# Altium PCB topvent.PcbDoc
Units mil, origin at the board's own origin, x right, y up, seen from the top; angles counter-clockwise.
Board outline 5000 x 5000 mil, 2 copper layers (Component Side, Bottom Layer), stack 65.3 mil thick; 9 components, 2 nets, 21 pads, 2 vias.
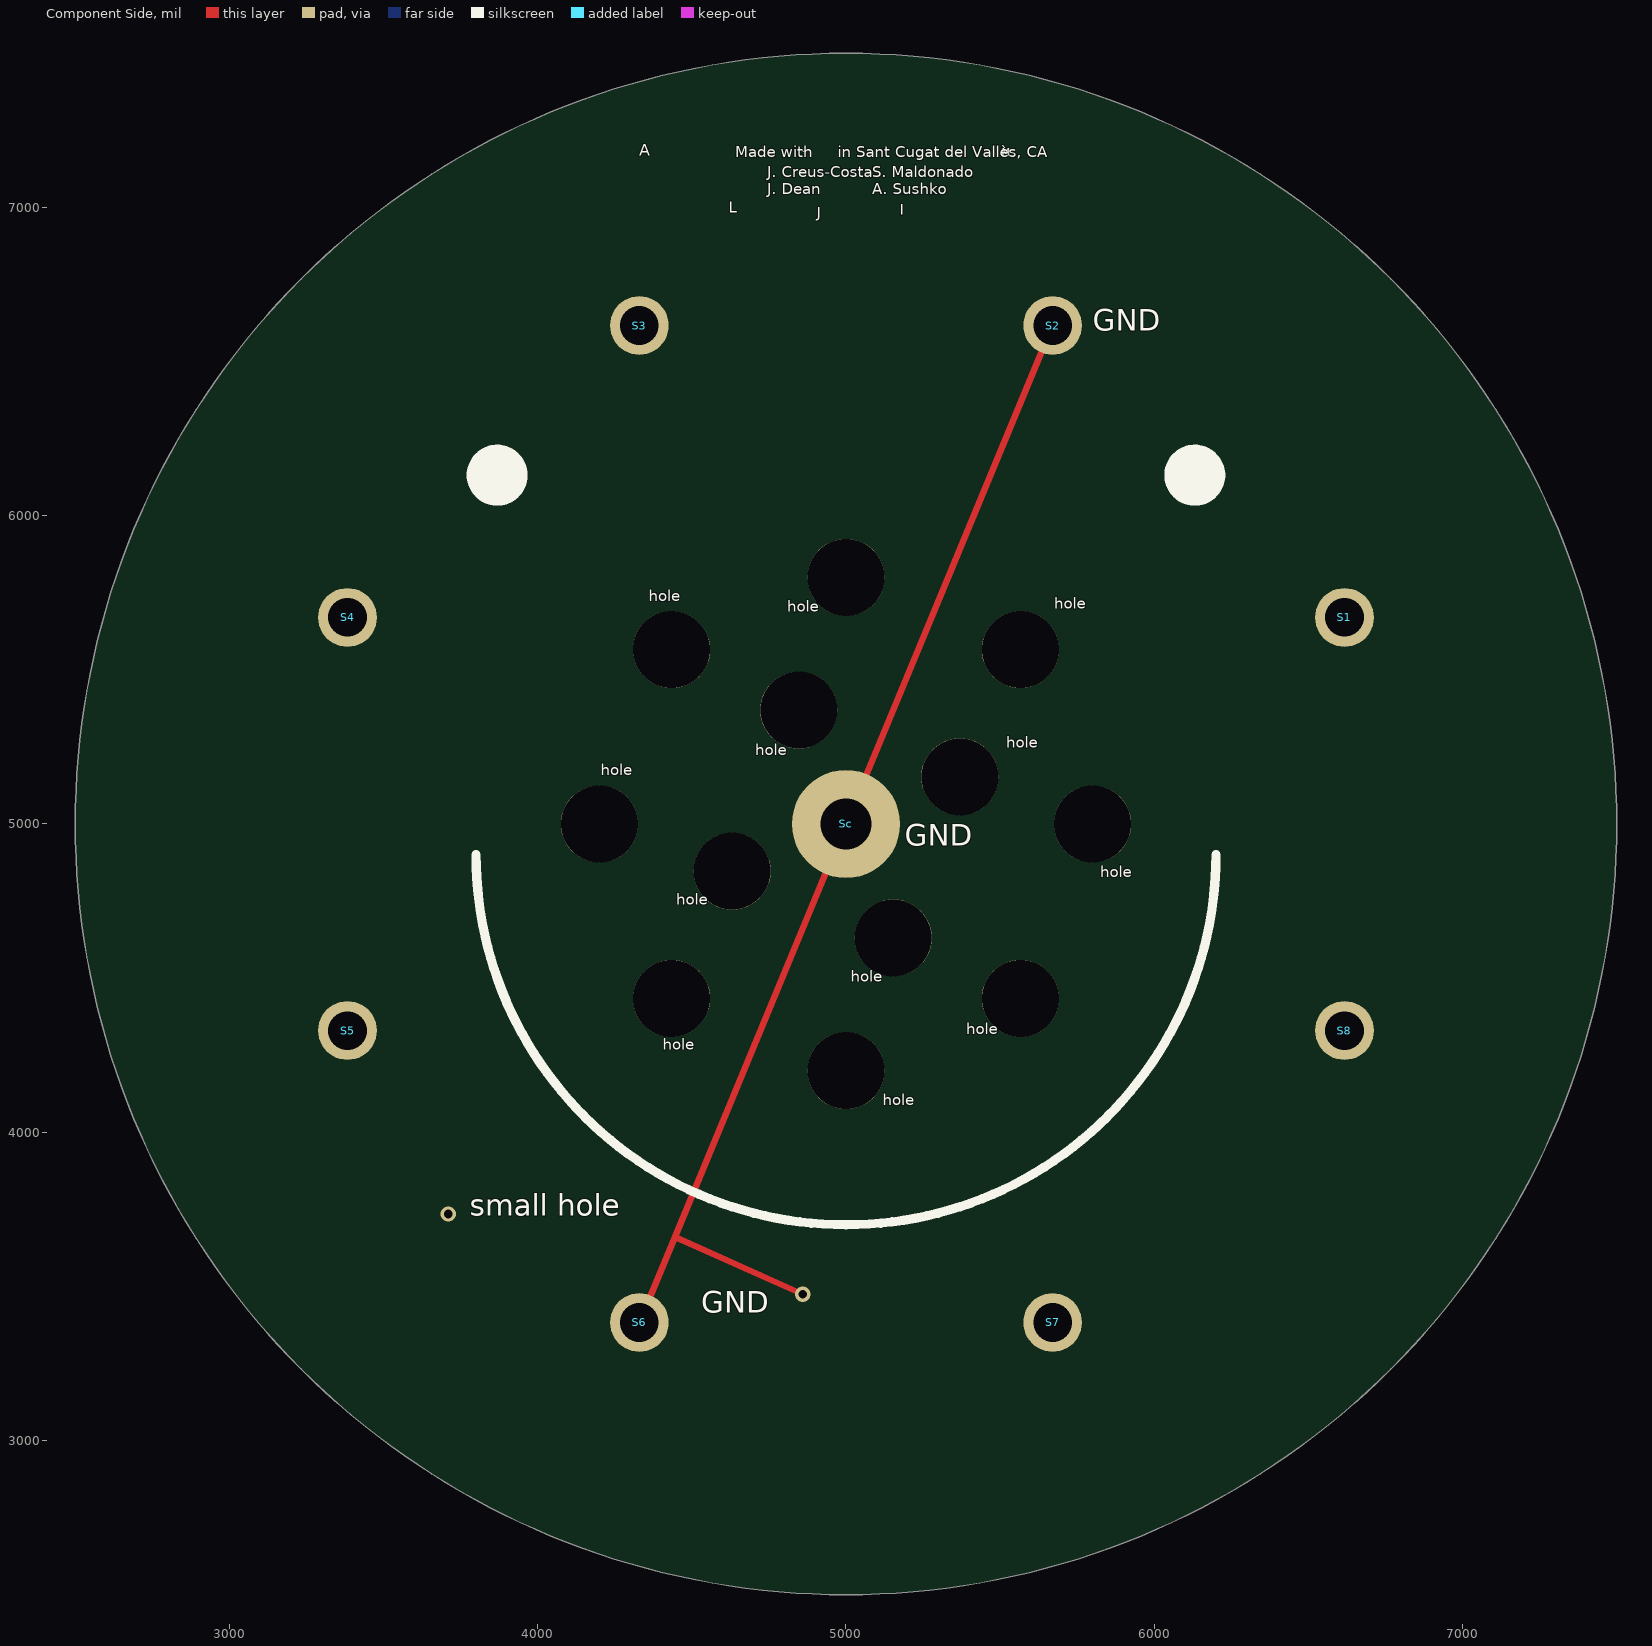
[diagram p0: Component Side view]
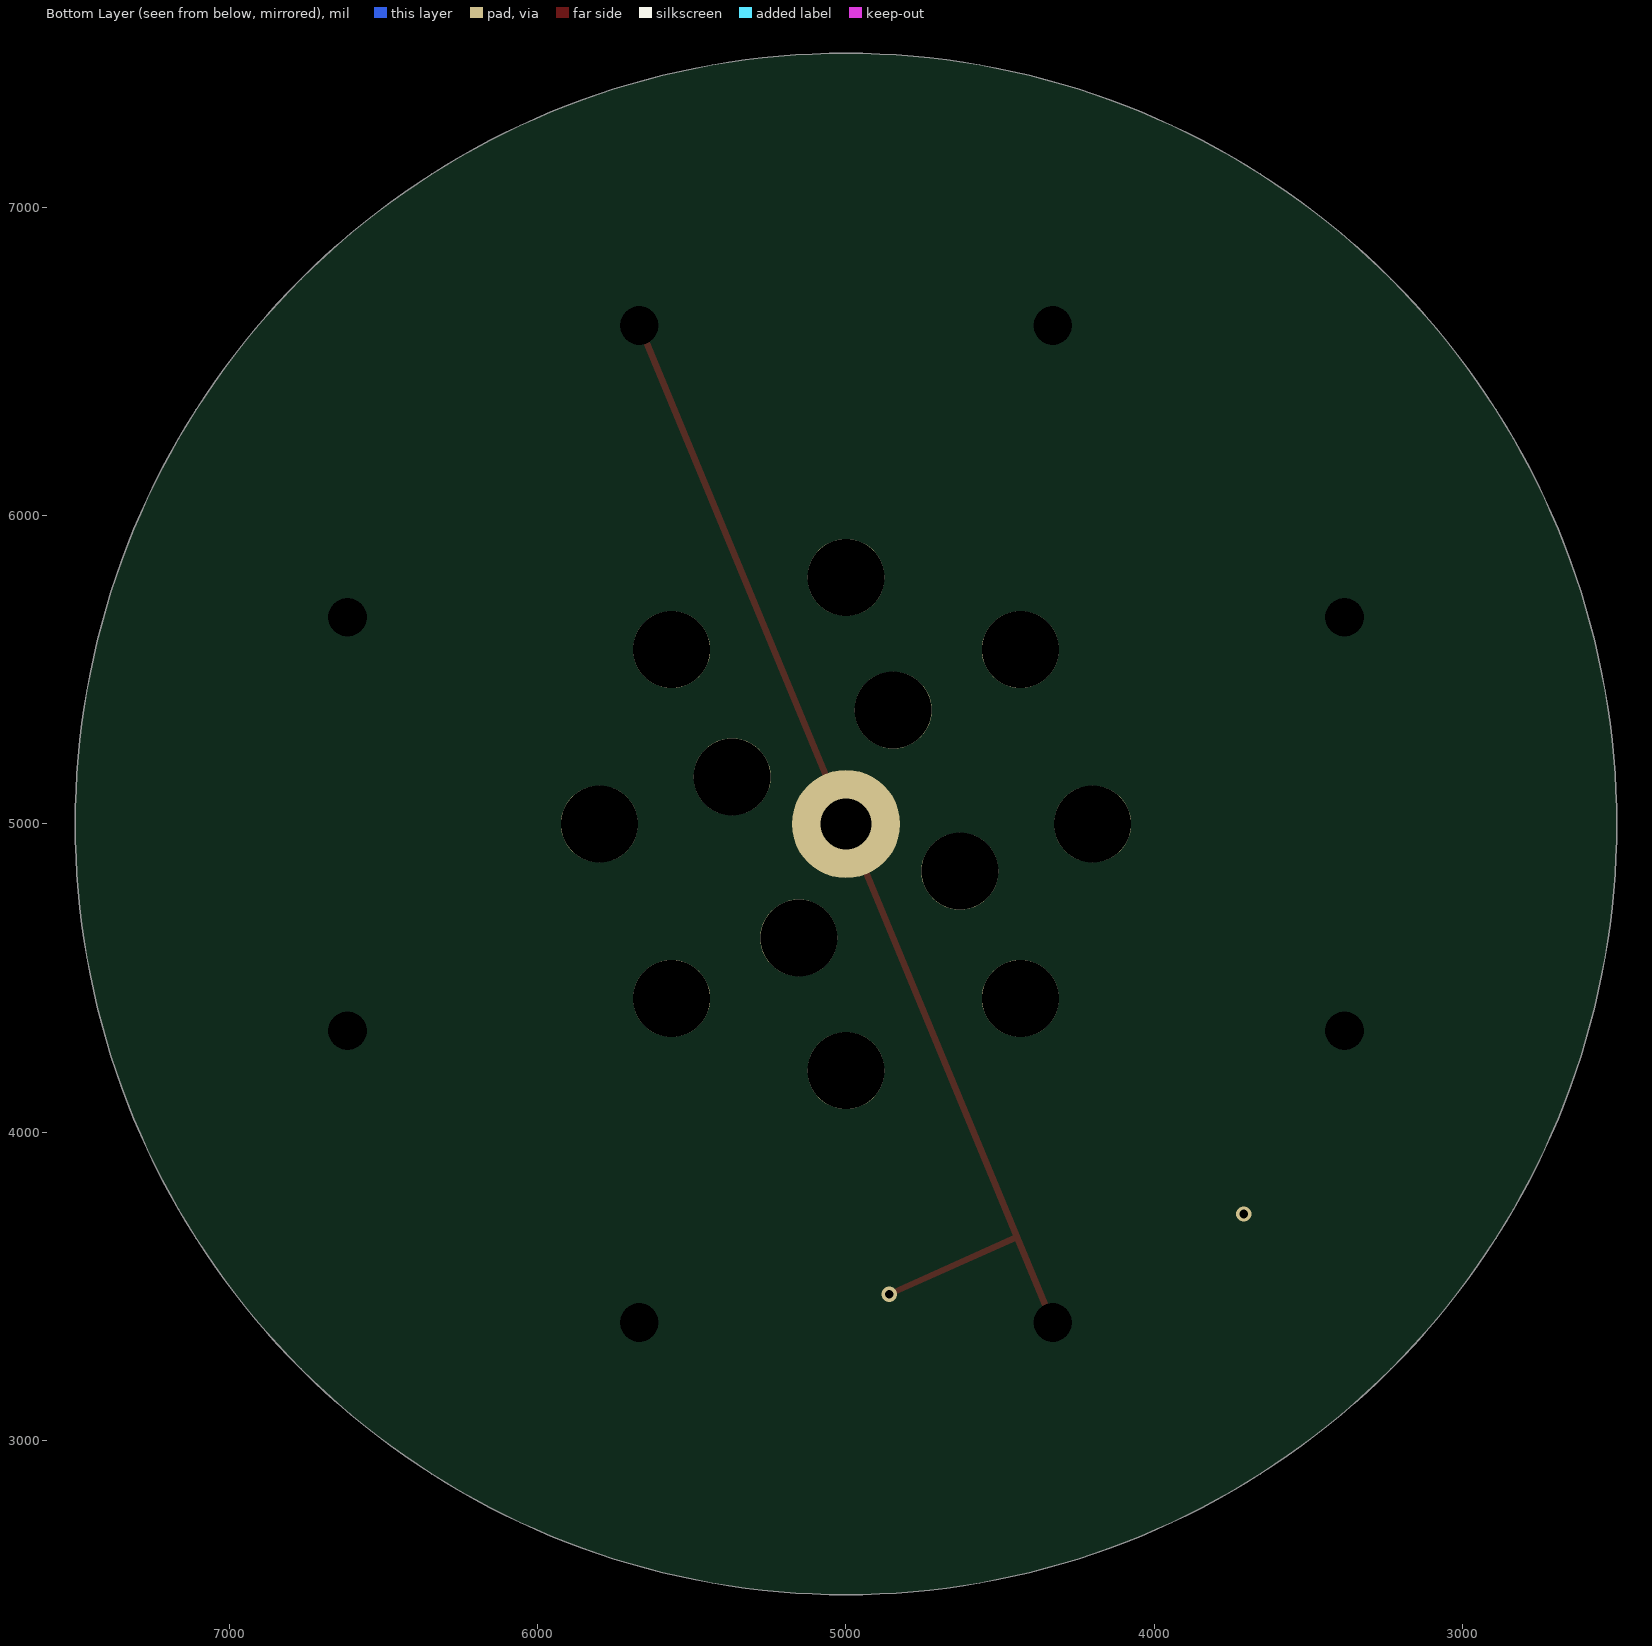
[diagram p1: Bottom Layer view, seen from below]

## Layer stack, top to bottom
Top Solder: solder mask 0.4, Solder Resist, Dk 3.5
Component Side: signal copper 1.4
Dielectric 1: core 62.5, FR-4, Dk 4.2
Bottom Layer: signal copper 1.4
Solder Side: solder mask 0.4, Solder Resist, Dk 3.5

## Board outline
5000,2500 cw(c5000,5000) 2500,5000 cw(c5000,5000) 5000,7500 cw(c5000,5000) 7500,5000 cw(c5000,5000)

## Design rules (kind name [scope] priority, off if disabled: settings)
Clearance [All] p1: gap=10 ignorepadtopadclearanceinfootprint=FALSE except(0: Arc-Hole Track-Hole SMDPad-Hole THPad-Hole Via-Hole Fill-Hole Poly-Hole Region-Hole Text-Hole)
HoleSize [All] p1: absolutevalues=TRUE maxlimit=247 minlimit=10 maxpercent=80.000 minpercent=20.000
PolygonConnect [All] p1: connectstyle=Relief reliefconductorwidth=10 reliefentries=4 polygonreliefangle="90 Angle" airgapwidth=10
RoutingVias [All] p1: holewidth=28 width=50 viastyle="Through Hole" minholewidth=28 minwidth=50 maxholewidth=28 maxwidth=50
SolderMaskExpansion [All] p1: expansion=4
Width [All] p1: maxlimit=10 minlimit=10 preferedwidth=10
29 further rules are at their usual default settings.

## Components (designator, comment, footprint, x,y, rotation, side; value= is the part's Value field where it differs from the comment)
S1 "4-40 Machine screw" SCREW_4-40#1 6445,5615 r0 top
S2 "4-40 Machine screw" SCREW_4-40#2 8895,2740 r0 top
S3 "4-40 Machine screw" SCREW_4-40#3 9145,2740 r0 top
S4 "4-40 Machine screw" SCREW_4-40#4 9390,2740 r0 top
S5 "4-40 Machine screw" SCREW_4-40#5 7240,3605 r0 top
S6 "4-40 Machine screw" SCREW_4-40#6 7490,3605 r0 top
S7 "4-40 Machine screw" SCREW_4-40#7 7740,3605 r0 top
S8 "4-40 Machine screw" SCREW_4-40#8 7985,3605 r0 top
Sc "4-40 Machine screw" SCREW_4-40#9 9940,2740 r0 top

## Footprints (in the part's own frame and the unit in brackets; to place one, negate y for a bottom-side part, rotate by r counter-clockwise, add the part's x,y. Pads: shape width x height; smd on the part's side, far side on the other; paste and mask are expansions set on the pad)
SCREW_4-40#1 [mil] "4-40 machine screw. Mmm.. tasty"
  oval 190x191 / inner oval 190x191 / far side round 0 hole 125 unplated: 1(172,55)
SCREW_4-40#2 [mil] "4-40 machine screw. Mmm.. tasty"
  oval 190x191 / inner oval 190x191 / far side round 0 hole 125 unplated: 1(-3225,3877)
SCREW_4-40#3 [mil] "4-40 machine screw. Mmm.. tasty"
  oval 190x191 / inner oval 190x191 / far side round 0 hole 125 unplated: 1(-4815,3877)
SCREW_4-40#4 [mil] "4-40 machine screw. Mmm.. tasty"
  oval 190x191 / inner oval 190x191 / far side round 0 hole 125 unplated: 1(-6007,2930)
SCREW_4-40#5 [mil] "4-40 machine screw. Mmm.. tasty"
  oval 190x191 / inner oval 190x191 / far side round 0 hole 125 unplated: 1(-3857,725)
SCREW_4-40#6 [mil] "4-40 machine screw. Mmm.. tasty"
  oval 190x191 / inner oval 190x191 / far side round 0 hole 125 unplated: 1(-3160,-222)
SCREW_4-40#7 [mil] "4-40 machine screw. Mmm.. tasty"
  oval 190x191 / inner oval 190x191 / far side round 0 hole 125 unplated: 1(-2070,-222)
SCREW_4-40#8 [mil] "4-40 machine screw. Mmm.. tasty"
  oval 190x191 / inner oval 190x191 / far side round 0 hole 125 unplated: 1(-1368,725)
SCREW_4-40#9 [mil] "4-40 machine screw. Mmm.. tasty"
  oval 350x351 hole 166: 1(-4940,2260)

## Part data
S1 S2 S3 S4 S5 S6 S7 S8 Sc: library part SCREW_4-40, Supplier 1=Digi-Key

## Free pads (board coordinates)
  round 250 hole 250 unplated: 3(4200,5000) 3(4434.31,4434.31) 3(4434.31,5565.69) 3(4630.45,4846.93) 3(4846.93,5369.55) 3(5000,4200) 3(5000,5800) 3(5153.07,4630.45) 3(5369.55,5153.07) 3(5565.69,4434.31) 3(5565.69,5565.69) 3(5800,5000)

## Via types
v1: diameter 50, hole 28, Component Side to Bottom Layer, 2 vias

## Nets (pads, with @x,y where several pads share a name; then routed paths per layer and width w, separated by ;. In a path a pad name is that pad's centre, name@x,y a point inside that pad or via, vN(x,y) a via of type N, cw(c..) or ccw(c..) an arc to the next point about the centre after c; other vN are vias at no path point)
GND: S2.1 S6.1 Sc.1 | length 3955.2
  Component Side w20: S6.1 4445,3660.54 ; v1(4860,3475) 4445,3660.54 ; S2.1 5111.87,5270 5060,5144.81 Sc.1 4888.13,4730 4445,3660.54
VBAT: 
pads on no net: S1.1 S3.1 S4.1 S5.1 S7.1 S8.1
copper on no net:
  other v1: 3710,3735

## Silkscreen, mask and mechanical layers (free items; w line width, h text height)
Top Overlay:
  circle w100: c6131.37,6131.37 r49
  circle w100: c3868.63,6131.37 r49
  lines w30: 3800,4900 ccw(c5000,4900) 6200,4900
  text "H" at 4860,7175 h10
  text "M" at 5505,7160 h40
  text "A" at 4330,7155 h65
  text "Made with     in Sant Cugat del Vallès, CA" at 4640,7150 h60
  text "J. Creus-Costa" at 4745,7085 h60
  text "S. Maldonado" at 5085,7085 h60
  text "J. Dean" at 4745,7030 h60
  text "A. Sushko" at 5085,7030 h60
  text "L" at 4620,6970 h60
  text "I" at 5175,6965 h60
  text "J" at 4905,6955 h60
  text "GND" at 5800,6575 h120
  text "hole" at 4360,5710 h60
  text "hole" at 5675,5685 h60
  text "hole" at 4810,5675 h60
  text "hole" at 5520,5235 h60
  text "hole" at 4705,5210 h60
  text "hole" at 4205,5145 h60
  text "GND" at 5190,4905 h120
  text "hole" at 5825,4815 h60
  text "hole" at 4450,4725 h60
  text "hole" at 5015,4475 h60
  text "hole" at 5390,4305 h60
  text "hole" at 4405,4255 h60
  text "hole" at 5120,4075 h60
  text "small hole" at 3780,3705 h120
  text "GND" at 4530,3390 h120
Mechanical 1:
  circle w10: c5000,5000 r2500